# Allegro board BeagleDust Rev A0_20180906.brd
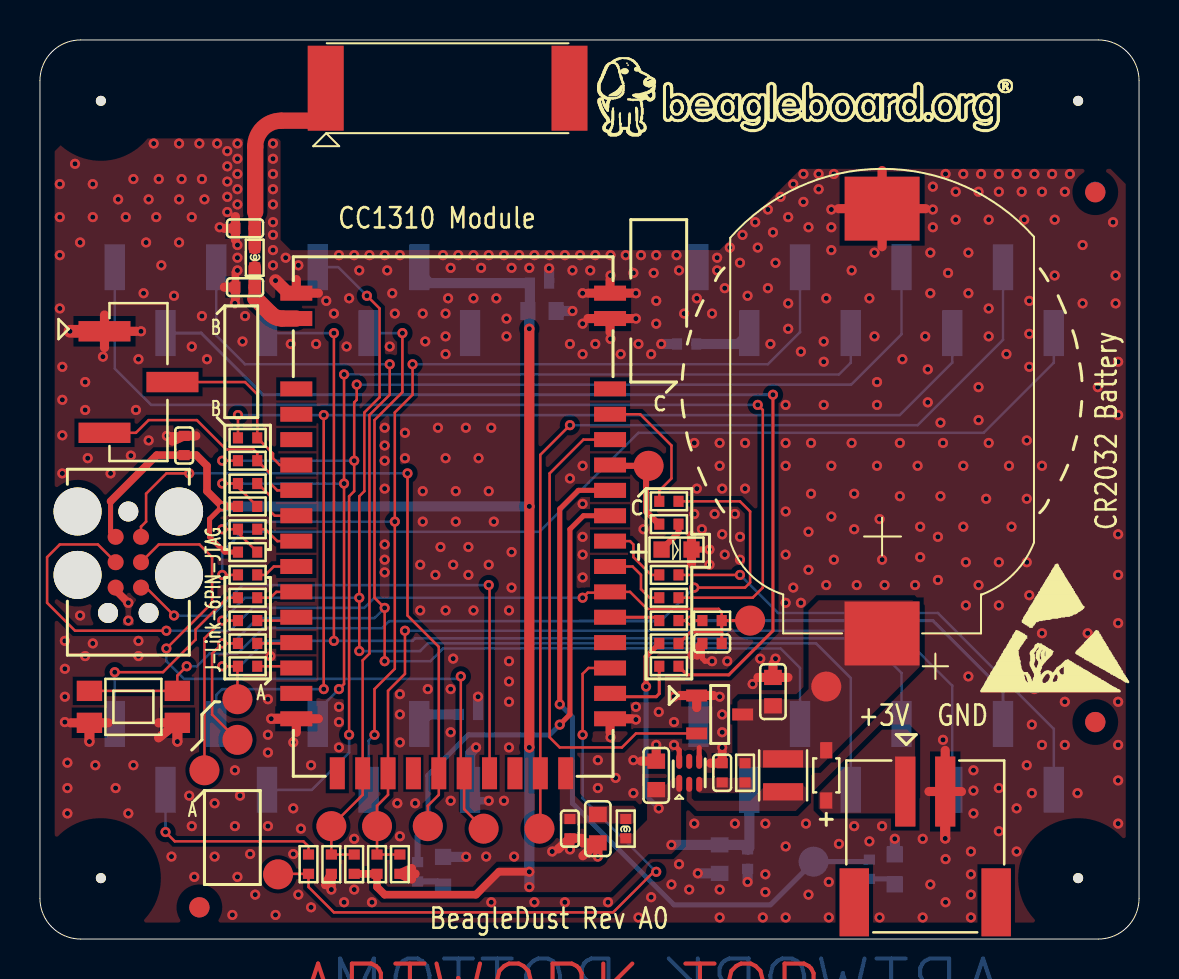
[diagram p0: board, top side]
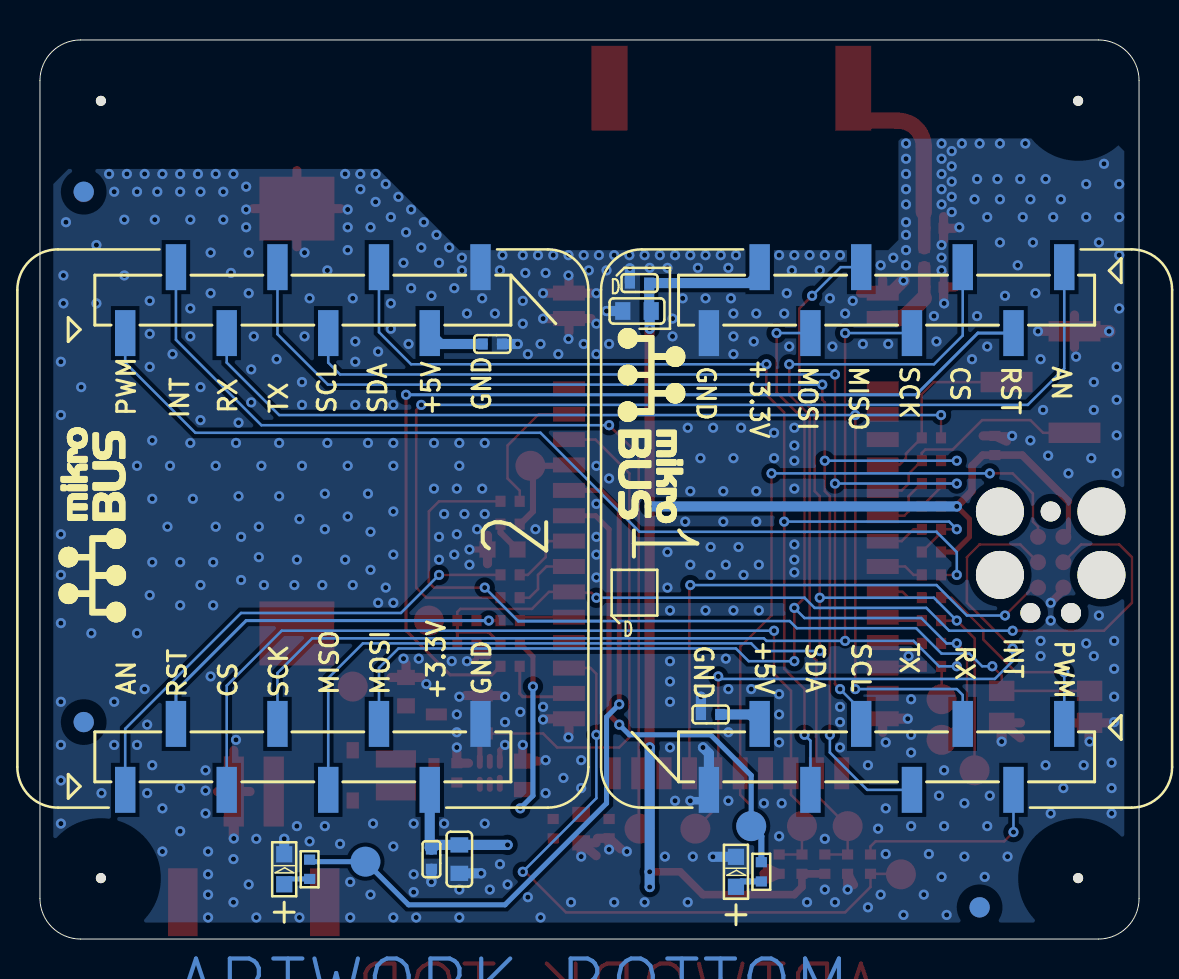
[diagram p1: board, bottom side, seen from below]

Outline 55 x 45 mm; copper layers: TOP, BOTTOM. Coordinates in mm from the lower left corner of the outline.
Outline path: 0,42.97 arc(0.6,44.4) 2.03,45 52.97,45 arc(54.4,44.4) 55,42.97 55,2.03 arc(54.4,0.6) 52.97,0 2.03,0 arc(0.6,0.6) 0,2.03 0,42.97

## Placement (name value [footprint] x y rotation side)
ANT1  ChipAntenna-1204  [ANT1204-SMT2P]  20.4 42.58 0 top
C1  0.1uF  [C0402]  7.22 24.7 90 top
C2  0.1uF  [C0402]  26.52 5.52 270 top
C3  22uF  [C0603]  27.92 5.52 270 top
C4  0.1uF  [C0402]  32.36 29.78 180 bottom
C5  0.1uF  [C0402]  35.41 4 270 bottom
C6  22uF  [C0603]  34.01 4 270 bottom
C7  10uF  [C0603]  36.68 12.38 90 top
C8  10uF  [C0603]  30.84 8.19 90 top
C9  0.1uF  [C0402]  34.14 8.32 90 top
C47  3.9pF  [C0402]  10.26 32.63 180 top
C48  0.1uF  [C0402]  25 32.83 0 bottom
C49  0.1uF  [C0402]  21.44 11.24 0 bottom
C50  22uF  [C0603]  25.12 31.43 0 bottom
C51  3.9pF  [C0402]  10.26 35.57 180 top
C52  0.1uF  [C0402]  33.63 14.79 180 top
D1  SD103AWS-7-F  [SOD323]  39.35 8.19 90 top
FB1  120ohm  [L0402]  29.31 5.52 90 top
J1  JTP254-S180A-103-002-GR  [HS3_508]  4.93 27.88 270 top
J2  TC2030-IDC-FP  [JTAG_TC2030-IDC-FP]  4.42 18.86 270 top
J3  2.54mm 1X8  [SOCKET8P508_2082X460X900N]  41.84 9.12 180 bottom
J4  2.54mm 1X8  [SOCKET8P508_2082X460X900N]  41.84 31.98 180 bottom
J5  2.00mm 1x2  [CONS2_2B79X86K]  44.3 4.63 180 top
J6  BLP2032SM-GTR  [BATTERY-HOLDER_CR2032]  42.14 27.49 90 top
J7  2.54mm 1X8  [SOCKET8P508_2082X460X900N]  12.63 31.98 0 bottom
J8  2.54mm 1X8  [SOCKET8P508_2082X460X900N]  12.63 9.12 0 bottom
L1  4.7uH  [L25X20]  37.19 8.19 270 top
L2  4.7nH  [L0402]  10.75 34.1 270 top
LED1  Green  [D0603]  31.85 19.49 0 top
LED2  Green  [D0603]  42.78 3.49 90 bottom
LED3  Green  [D0603]  20.17 3.36 90 bottom
MH1  NI  [MHNP275]  3.05 3.05 0 top
MH2  NI  [MHNP275]  51.95 41.95 0 top
MH3  NI  [MHNP275]  51.95 3.05 0 top
MH4  NI  [MHNP275]  3.05 41.95 0 top
NOREF  #VAL  [unnamed]  52.81 37.38 0 top
NOREF#2  -  [#2]  0 42.97 0 top
NOREF#3  -  [#2]  3.05 3.05 90 top
NOREF#4  -  [#2]  2.03 0 90 top
NOREF#5  #VAL  [unnamed]  7.98 1.59 0 top
NOREF#6  #VAL  [unnamed]  52.81 10.86 0 top
NOREF#7  -  [#2]  3.05 41.95 0 top
NOREF#8  #VAL  [unnamed]  52.81 10.86 180 bottom
NOREF#9  #VAL  [unnamed]  7.98 1.59 180 bottom
NOREF#10  #VAL  [unnamed]  52.81 37.4 180 bottom
R1  2.2K  [R0402]  10.39 19.37 0 top
R2  2.2K  [R0402]  10.39 21.65 0 top
R3  100R  [R0402]  10.39 25.08 0 top
R4  10K  [R0402]  31.47 17.08 0 top
R5  100R  [R0402]  10.39 23.94 0 top
R6  100R  [R0402]  10.39 22.8 0 top
R7  100R  [R0402]  10.39 20.51 0 top
R9  100R  [R0402]  10.39 15.94 0 top
R10  100R  [R0402]  10.39 14.79 0 top
R11  100R  [R0402]  10.39 13.65 0 top
R13  1M  [R0402]  15.72 3.75 90 top
R14  1M  [R0402]  16.87 3.75 90 top
R15  0R  [R0402]  14.58 3.75 90 top
R16  0R  [R0402]  18.01 3.75 90 top
R17  470R  [R0402]  31.47 20.76 0 top
R18  400R  [R0402]  35.28 8.32 270 top
R19  470R  [R0402]  41.51 3.49 270 bottom
R20  470R  [R0402]  18.9 3.36 270 bottom
R27  100R  [R0402]  31.47 18.22 0 top
R31  100R  [R0402]  31.47 13.65 0 top
R138  100R  [R0402]  33.63 15.94 180 top
R139  100R  [R0402]  31.47 15.94 0 top
R140  100R  [R0402]  13.44 3.75 90 top
R141  100R  [R0402]  10.39 17.08 0 top
R142  100R  [R0402]  10.39 18.22 0 top
R143  100R  [R0402]  31.47 21.91 0 top
R144  100K  [R0402]  31.47 14.79 0 top
S1  Tacticle Switch  [SWS4B46X28]  4.68 11.62 0 top
TP1  NI  [TP150]  35.54 15.94 90 top
TP3  NI  [TP150]  30.46 23.68 0 top
TP5  NI  [TP150]  38.71 3.87 180 bottom
TP6  NI  [TP150]  19.41 5.65 0 top
TP7  NI  [TP150]  22.2 5.52 0 top
TP8  NI  [TP150]  16.87 5.65 0 top
TP9  NI  [TP150]  19.41 5.65 180 bottom
TP10  NI  [TP150]  25 5.52 0 top
TP11  NI  [TP150]  39.35 12.64 0 top
TP12  NI  [TP150]  14.58 5.65 0 top
TP13  NI  [TP150]  9.88 12 0 top
TP14  NI  [TP150]  9.88 9.97 0 top
TP15  NI  [TP150]  8.23 8.44 0 top
TP16  NI  [TP150]  11.91 3.24 0 top
U1  E70 915T14S  [WIFIMD_EBYTE_E70_915T14]  20.68 21.14 180 top
U2  TPS3839L30DBZ  [SOT95P237X112-3N]  34.01 11.24 0 top
U3  TPS610981DSE  [SON50P150X150X80-6N]  32.49 8.32 90 top

## Library data of the parts
ANT1 = ChipAntenna-1204
C1-C9 C47-C52 = C
D1 = Diode Schottky
FB1 = FB
J1 = JTP254-S180A-103-002-GR
J2 = TC2030-IDC-FP
J3 J4 J7 J8 = SIP8
J5 = SIP2M2
J6 = BLP2032SM-GTR
L1 L2 = L
LED1-LED3 = LED
MH1-MH4 = METALLIC HOLE
NOREF NOREF#5 NOREF#6 NOREF#9 = -: Tolerance: #TOL; User Part Number: HAMP
NOREF#8 NOREF#10 = -: User Part Number: HAMP; Tolerance: #TOL
R1-R7 R9-R11 R13-R20 R27 R31 R138-R144 = R
S1 = PSW4
TP1 TP3 TP5-TP16 = TEST POINT
U1 = E70 915T14S
U2 = TPS3839L30DBZ
U3 = TPS610981DSE

## Footprints (pads in the part's own frame, mm; a bottom-side part is the same pattern mirrored in y, then rotated)
ANT1204-SMT2P
  rect 1.8x4.25 smd: 1(-6.1,0) 2(6.1,0)
BATTERY-HOLDER_CR2032
  rect 3.2x3.75 smd: 1(-12.2,0) 2(9.06,0)
C0402
  rect 0.508x0.559 smd: 1(-0.483,0) 2(0.483,0)
C0603
  rect 0.762x0.889 smd: 1(-0.711,0) 2(0.711,0)
CONS2_2B79X86K
  rect 1.016x3.505 smd: 1(1,-2.748) 2(-1,-2.748)
  rect 1.473x3.404 smd: 3(3.55,2.798) 4(-3.55,2.798)
D0603
  rect 0.813x0.813 smd: 1(-0.75,0) 2(0.75,0)
HS3_508
  rect 1.02x2.6 smd: 1(-2.54,-1.7) 2(0,1.7) 3(2.54,-1.7)
JTAG_TC2030-IDC-FP
  round 2.4 hole 2.4 unplated: (-2.54,2.54) (-2.54,-2.54) (0.635,2.54) (0.635,-2.54)
  round 1 hole 1 unplated: (-2.54,0) (2.54,1.016) (2.54,-1.016)
  round 0.8 smd: 1(-1.27,-0.635) 2(-1.27,0.635) 3(0,-0.635) 4(0,0.635) 5(1.27,-0.635) 6(1.27,0.635)
L25X20
  rect 0.864x2.007 smd: 1(-0.825,0) 2(0.825,0)
L0402
  rect 0.508x0.559 smd: 1(-0.483,0) 2(0.483,0)
MHNP275
  round 0.5 hole 2.75 unplated: (0,0)
R0402
  rect 0.508x0.559 smd: 1(-0.483,0) 2(0.483,0)
SOCKET8P508_2082X460X900N
  rect 1.02x2.3 smd: 1(-8.89,-1.65) 2(-6.35,1.65) 3(-3.81,-1.65) 4(-1.27,1.65) 5(1.27,-1.65) 6(3.81,1.65) 7(6.35,-1.65) 8(8.89,1.65)
SOD323
  rect 0.813x0.61 smd: 1(-1.256,0) 2(1.256,0)
SON50P150X150X80-6N
  oval 0.85x0.3 smd: 1(-0.525,0.5)
  oval 0.75x0.3 smd: 2(-0.575,0) 3(-0.575,-0.5) 4(0.575,-0.5) 5(0.575,0) 6(0.575,0.5)
SOT95P237X112-3N
  rect 1.05x0.6 smd: 1(-1.15,0.95) 2(-1.15,-0.95) 3(1.15,0)
SWS4B46X28
  rect 1.27x1.016 smd: 1(-2.2,-0.8) 2(-2.2,0.8) 3(2.2,-0.8) 4(2.2,0.8)
TP150
  round 1.5 smd: 1(0,0)
unnamed
  round 1.016 smd: 1(0,0)
WIFIMD_EBYTE_E70_915T14
  rect 1.6x0.75 smd: 1(7.85,-11.18) 2(7.85,-9.91) 3(7.85,-6.39) 4(7.85,-5.12) 5(7.85,-3.85) 6(7.85,-2.58) 7(7.85,-1.31) 8(7.85,-0.04) 9(7.85,1.23) 10(7.85,2.5) 11(7.85,3.77) 12(7.85,5.04) 13(7.85,6.31) 14(7.85,7.58) 15(7.85,8.85) 16(7.85,10.12) 27(-7.85,10.12) 28(-7.85,8.85) 29(-7.85,7.58) 30(-7.85,6.31) 31(-7.85,5.04) 32(-7.85,3.77) 33(-7.85,2.5) 34(-7.85,1.23) 35(-7.85,-0.04) 36(-7.85,-1.31) 37(-7.85,-2.58) 38(-7.85,-3.85) 39(-7.85,-5.12) 40(-7.85,-6.39) 41(-7.85,-9.91) 42(-7.85,-11.18)
  rect 0.75x1.6 smd: 17(5.8,12.85) 18(4.53,12.85) 19(3.26,12.85) 20(1.99,12.85) 21(0.72,12.85) 22(-0.55,12.85) 23(-1.82,12.85) 24(-3.09,12.85) 25(-4.36,12.85) 26(-5.63,12.85)

## Nets
GND: C1.2 C2.2 C3.2 C4.2 C5.2 C6.2 C7.2 C8.2 C9.2 C47.2 C48.2 C49.2 C50.2 C51.2 C52.2 J1.1 J2.5(GND) J3.8 J4.8 J5.2 J6.2(GND) J7.8 J8.8 LED1.2(C) LED2.2(C) LED3.2(C) R15.1 R16.1 S1.1 S1.3 U1.1(GND1) U1.16(GND2) U1.27(GND3) U1.41(GND4) U1.42(GND5) U2.1(GND) U3.4(MODE) U3.6(GND)
CC1310_RESETN: C52.1 J2.3(#RESET) R138.1 R144.2 TP1.1(TP) U1.32(RST)
CC1310_TCK: J2.4(SWCLK) TP7.1(TP) U1.22(TCKC)
CC1310_TDO: J2.6(SWO) U1.23(DIO_16)
CC1310_TMS: J2.2(SWDIO) TP6.1(TP) U1.21(TMSC)
DIO2_RXD: J4.3 J8.3 R3.1
DIO3_TXD: J4.4 J8.4 R5.1
DIO4_SCL: J4.5 J8.5 R2.2 R6.1
DIO5_SDA: J4.6 J8.6 R1.2 R7.1
DIO6_PWM2: J4.1 R142.1
DIO7_PWM1: J8.1 R141.1
DIO8_MISO: J3.5 J7.5 R9.1 TP15.1(TP)
DIO9_MOSI: J3.6 J7.6 R10.1 TP14.1(TP)
DIO10_SCLK: J3.4 J7.4 R11.1 TP13.1(TP)
DIO13_CS1: J7.3 R13.2 R15.2 TP12.1(TP) U1.18(DIO_13/M0)
DIO14_CS2: J3.3 R14.2 R16.2 TP8.1(TP) U1.19(DIO_14/RXD)
DIO18_INT2: J4.2 TP10.1(TP) U1.25(DIO_18/AUX)
DIO19_RST1: J7.2 R31.2
DIO20_INT1: J8.2 R140.2
DIO22_RST2: J3.2 R138.2 R139.2
DIO23_AN1: J7.1 R4.2
DIO24_AN2: J3.1 R27.2
LOWBAT_DETECT: U1.38(DIO_28) U2.2(R\E\S\E\T\)
MIKROBUS_STATUS1: R20.1 TP9.1(TP) U1.35(DIO_25)
MIKROBUS_STATUS2: R19.1 TP5.1(TP) U1.36(DIO_26)
POWERINDICATOR: R17.1 TP3.1(TP) U1.37(DIO_27)
SYS_3V3: C1.1 C5.1 C6.1 C8.1 C48.1 C50.1 FB1.1 J2.1(VTREF) J3.7 J7.7 R1.1 R2.1 R13.1 R14.1 R144.1 U3.1(VMAIN)
USRE BUTTON: R143.1 U1.39(DIO_29)
N19096019: LED1.1(A) R17.2
N19097798: C4.1 J4.7
N19109066: L1.2 U3.2(SW)
N19109499: C7.1 D1.2(C) J6.1(VCC) L1.1 R18.1 TP11.1(TP) U2.3(VDD)
N19110009: C9.1 R18.2 U3.3(VIN)
N19122018: D1.1(A) J5.1
N19127612: J1.2 R3.2 U1.6(DIO_2/LNA_EN)
N19127618: J1.3 R5.2 U1.7(DIO_3/PA_EN)
N19127779: C2.1 C3.1 FB1.2 U1.26(VCC-2.2~3.8V)
N19127922: R6.2 U1.8(DIO_4)
N19127924: R7.2 U1.9(DIO_5)
N19127989: R9.2 U1.12(DIO_8)
N19127991: R10.2 U1.13(DIO_9)
N19127993: R11.2 U1.14(DIO_10)
N19128918: R143.2 S1.2 S1.4
N19129914: R4.1 U1.33(DIO_23)
N19137656: C47.1 L2.2 U1.2(ANT)
N19139252: ANT1.1 C51.1 L2.1
N19142206: C49.1 J8.7
N19142409: LED3.1(A) R20.2
N19145355: R27.1 U1.34(DIO_24)
N19145484: R31.1 U1.28(DIO_19)
N19147736: LED2.1(A) R19.2
N19157450: R140.1 TP16.1(TP) U1.29(DIO_20)
N19158301: R141.2 U1.11(DIO_7)
N19158356: R142.2 U1.10(DIO_6)
N19158507: R139.1 U1.31(DIO_22)

Pads without a net: ANT1 2; J5 3 4; NOREF 1; NOREF#5 1; NOREF#6 1; NOREF#8 1; NOREF#9 1; NOREF#10 1; U1 3 4 5 15 17 20 24 30 40; U3 5

## Via types
v1: diameter 0.508, hole 0.254, TOP to BOTTOM, 569 vias

## Routing (per net, layer and track width the routed paths; a pad name or vN(x,y) marks a point on that pad's centre or on a via; arc(x,y) is an arc through that point)
GND: length 77.5
  TOP w0.254: v1(31.73,9.71) 31.99,9.45 U3.6 ; C52.2 33.15,14.03 33.28,13.91 v1(33.63,13.91) ; U3.4 32.99,9.58
  TOP w0.305: LED1.2 v1(33.5,19.49)
  TOP w0.381: v1(9.88,33.46) 9.78,33.36 C47.2 ; C1.2 v1(6.35,25.18) ; 3.79,17.59 3.79,17.46 v1(4.42,16.83)
  TOP w0.457: 7.8,25.18 C1.2 6.63,24.92 ; v1(26.52,4.48) C2.2 ; C2.2 27.1,5.04 ; C2.2 25.93,4.51 ; 5.93,10.82 S1.3 5.93,10.07 ; 32.6,18.78 LED1.2 32.6,20.21 ; R16.1 18.59,3 ; R16.1 18.59,3.53 ; R16.1 18.77,3.26 ; 32.62,14.21 C52.2 32.88,14.21 ; J6.2 44.32,36.55 ; J6.2 39.96,36.55 ; J6.2 42.14,38.46 ; J6.2 42.14,34.65 ; 9.22,32.63 C47.2 9.78,32.04 ; 27.17,4.17 C3.2 ; C3.2 v1(27.92,4.13) ; C3.2 27.17,4.81 ; U1.42 29.63,32.33 ; U1.42 28.53,33.01 ; U1.42 27.42,32.33 ; U1.41 29.63,31.06 ; U1.41 28.53,30.37 ; U1.41 27.42,31.06 ; J5.2 45.3,9.44 ; J5.2 46.11,7.38 ; J5.2 44.49,7.38 ; 28.53,10.34 U1.27 29.63,11.02 ; 9.22,35.57 C51.2 ; C51.2 9.78,36.16 ; C51.2 9.78,34.99 ; C7.2 37.43,13.09 ; C7.2 35.93,13.09 ; C7.2 36.68,13.78 ; 30.84,9.59 C8.2 30.09,8.9 ; 13.93,32.33 U1.1 12.83,33.01 ; J1.1 3.23,31.23 ; J1.1 3.23,29.6 ; J1.1 4.83,30.42 ; 14.29,2.72 R15.1 14.58,2.7 ; 12.83,10.34 U1.16 13.93,11.02 ; U2.1 33.69,12.19 ; U2.1 32.03,12.19 ; U2.1 32.86,11.58 ; 3.42,10.82 S1.1 1.53,10.82 ; 34.14,9.36 C9.2 33.55,8.8
  TOP w0.508: S1.3 v1(6.88,9.88) ; U1.16 v1(11.57,11.02) ; S1.1 v1(2.48,9.88) ; J5.2 v1(45.3,5.03)
  TOP w0.635: J1.1 v1(1.5,30.42) ; v1(11.79,32.96) 12.42,32.33 U1.1
  BOTTOM w0.381: J8.8 21.52,7.09 21.69,6.92 v1(22.46,6.92)
  BOTTOM w0.508: C49.2 v1(21.92,12.13) ; LED2.2 v1(42.78,5.02) ; C6.2 v1(32.92,3.29) ; v1(21.82,9.59) 21.52,9.29 J8.8 ; LED3.2 v1(21.32,4.12) ; C50.2 v1(26.65,31.43) ; C5.2 v1(35.41,2.86) ; C4.2 v1(31.09,29.78) ; C48.2 v1(25.48,33.57)
  vias: v1(0.99,37.78) v1(0.99,36.13) v1(0.99,34.23) v1(0.99,31.56) v1(1.12,28.64) v1(1.12,26.99) v1(1.12,25.21) v1(1.12,23.3) v1(1.25,14.92) v1(1.25,13.52) v1(1.25,12.13) v1(1.25,10.86) v1(1.37,8.83) v1(1.37,7.56) v1(1.37,6.29) v1(1.75,38.8) v1(2.01,34.86) v1(2.01,16.19) v1(2.26,27.88) v1(2.26,26.48) v1(2.26,14.16) v1(2.39,24.07) v1(2.64,37.78) v1(2.64,36.13) v1(2.64,14.79) v1(2.77,8.7) v1(3.15,29.15) v1(3.53,23.3) v1(3.79,7.56) v1(3.91,37.02) v1(4.29,36.13) v1(4.42,15.94) v1(4.42,6.29) v1(4.55,24.19) v1(4.68,38.04) v1(4.68,8.7) v1(4.8,26.48) v1(4.93,29.02) v1(4.93,14.92) v1(4.93,14.16) v1(5.06,30.42) v1(5.18,32.32) v1(5.31,34.86) v1(5.44,37.02) v1(5.44,24.95) v1(5.69,39.81) v1(5.82,36.13) v1(5.95,38.04) v1(6.07,33.72) v1(6.58,4.13) v1(6.71,32.19) v1(6.96,39.81) v1(6.96,37.02) v1(6.96,34.86) v1(7.09,38.04) v1(7.47,7.17) v1(7.6,36.13) v1(7.6,29.65) v1(7.6,5.65) v1(7.72,3.11) v1(7.98,39.81) v1(8.1,38.04) v1(8.1,31.18) v1(8.23,37.02) v1(8.36,29.02) v1(8.74,6.79) v1(8.74,4.13) v1(8.87,39.81) v1(8.99,35.62) v1(9.37,39.43) v1(9.37,38.67) v1(9.37,37.91) v1(9.37,37.15) v1(9.37,36.38) v1(9.63,1.21) v1(9.76,31.81) v1(9.76,8.44) v1(9.76,5.65) v1(9.88,39.81) v1(9.88,39.05) v1(9.88,38.29) v1(9.88,37.53) v1(9.88,36.77) v1(9.88,34.73) v1(9.88,34.1) v1(9.88,3.11) v1(10.01,7.17) v1(10.14,29.91) v1(10.26,31.18) v1(10.52,4.25) v1(10.77,2.22) v1(11.41,12) v1(11.41,10.22) v1(11.41,9.33) v1(11.41,5.65) v1(11.53,14.16) v1(11.66,39.81) v1(11.66,39.05) v1(11.66,38.29) v1(11.66,37.53) v1(11.66,36.77) v1(11.66,35.88) v1(11.66,35.24) v1(11.66,34.48) v1(11.66,33.72) v1(11.79,1.21) v1(12.3,34.1) v1(12.55,29.78) v1(12.68,9.84) v1(12.68,6.54) v1(12.68,4.25) v1(12.93,33.72) v1(12.93,2.22) v1(13.06,5.52) v1(13.57,8.7) v1(13.57,1.59) v1(13.82,29.78) v1(14.33,31.94) v1(14.58,2.48) v1(14.71,31.3) v1(14.96,34.23) v1(14.96,11.62) v1(14.96,10.86) v1(14.96,9.59) v1(15.22,1.84) v1(15.34,29.65) v1(15.47,32.07) v1(15.72,34.23) v1(15.72,5.02) v1(15.72,2.48) v1(15.98,33.46) v1(16.49,34.23) v1(16.61,1.84) v1(17.25,34.23) v1(17.25,25.59) v1(17.25,24.7) v1(17.25,23.94) v1(17.25,22.54) v1(17.25,19.75) v1(17.25,18.99) v1(17.25,18.35) v1(17.38,33.46) v1(17.5,29.65) v1(17.63,32.32) v1(17.76,31.3) v1(17.88,6.79) v1(18.01,34.23) v1(18.01,12.25) v1(18.01,11.24) v1(18.01,9.84) v1(18.01,5.14) v1(18.26,25.34) v1(18.26,24.07) v1(18.77,6.79) v1(19.03,18.73) v1(19.03,16.45) v1(19.15,31.3) v1(19.15,22.41) v1(19.15,20.89) v1(19.28,29.91) v1(19.41,12.51) v1(19.79,18.22) v1(19.92,25.59) v1(20.04,19.62) v1(20.17,34.23) v1(20.3,31.3) v1(20.3,30.16) v1(20.3,29.27) v1(20.3,24.07) v1(20.3,16.45) v1(20.42,32.07) v1(20.55,33.59) v1(20.55,12.51) v1(20.55,10.35) v1(20.55,6.92) v1(20.68,18.73) v1(20.68,14.03) v1(20.8,22.41) v1(20.8,20.89) v1(20.93,34.23) v1(21.31,25.59) v1(21.44,19.62) v1(21.44,18.22) v1(21.69,34.23) v1(21.69,32.07) v1(21.69,16.45) v1(21.95,24.07) v1(22.07,33.59) v1(22.33,4.13) v1(22.46,34.23) v1(22.46,22.41) v1(22.46,18.73) v1(22.58,25.59) v1(22.58,1.84) v1(22.71,20.89) v1(22.84,32.07) v1(23.22,34.23) v1(23.22,6.92) v1(23.34,31.05) v1(23.34,30.16) v1(23.47,16.45) v1(23.47,13.91) v1(23.47,12.89) v1(23.47,11.87) v1(23.47,9.59) v1(23.6,33.59) v1(23.6,19.37) v1(23.6,17.59) v1(23.73,4.13) v1(23.98,34.23) v1(24.49,33.59) v1(24.74,34.23) v1(24.74,1.84) v1(25.5,34.23) v1(25.63,4.38) v1(26.27,34.23) v1(26.27,1.84) v1(26.52,29.78) v1(26.52,23.05) v1(26.65,33.46) v1(27.03,34.23) v1(27.15,32.32) v1(27.15,30.8) v1(27.15,29.27) v1(27.15,23.68) v1(27.15,21.78) v1(27.15,20.13) v1(27.15,19.24) v1(27.15,18.1) v1(27.54,33.46) v1(27.79,34.23) v1(27.79,29.78) v1(27.92,8.95) v1(27.92,7.56) v1(28.42,1.84) v1(28.55,34.23) v1(28.55,33.21) v1(28.55,30.03) v1(28.55,10.1) v1(28.81,8.06) v1(29.06,29.27) v1(29.31,34.23) v1(29.69,33.34) v1(29.69,8.95) v1(29.69,7.3) v1(29.82,32.32) v1(29.82,31.05) v1(29.82,11.62) v1(29.82,10.98) v1(29.95,29.78) v1(29.95,1.08) v1(30.08,34.23) v1(30.2,20.51) v1(30.58,29.27) v1(30.58,2.09) v1(30.71,33.34) v1(30.84,34.23) v1(30.84,31.94) v1(30.84,30.8) v1(30.84,9.71) v1(30.96,11.37) v1(31.6,2.73) v1(31.73,12.13) v1(31.73,10.86) v1(31.85,34.23) v1(31.98,33.46) v1(31.98,3.75) v1(32.23,31.3) v1(32.49,2.48) v1(32.74,24.83) v1(32.74,21.27) v1(32.74,5.78) v1(32.87,32.07) v1(32.87,22.54) v1(33.12,20.51) v1(33.5,18.73) v1(33.63,31.3) v1(33.76,21.27) v1(33.89,34.1) v1(33.89,33.46) v1(34.01,24.83) v1(34.01,23.68) v1(34.01,12.13) v1(34.01,2.48) v1(34.01,1.08) v1(34.14,22.54) v1(34.14,20.26) v1(34.14,11.24) v1(34.14,10.35) v1(34.14,9.59) v1(34.27,32.57) v1(34.27,19.24) v1(34.39,13.91) v1(34.52,34.61) v1(34.77,21.27) v1(34.77,5.78) v1(35.03,33.84) v1(35.03,20.13) v1(35.03,18.99) v1(35.16,35.24) v1(35.28,24.83) v1(35.28,22.54) v1(35.41,32.19) v1(35.66,12.76) v1(35.79,35.88) v1(35.92,34.61) v1(36.04,14.03) v1(36.17,1.08) v1(36.3,5.78) v1(36.3,3.24) v1(36.3,2.35) v1(36.43,36.51) v1(36.43,32.57) v1(36.55,29.78) v1(36.68,35.37) v1(36.81,33.84) v1(36.81,14.03) v1(37.06,37.15) v1(37.31,26.73) v1(37.31,24.83) v1(37.31,23.68) v1(37.31,21.4) v1(37.31,19.24) v1(37.31,16.83) v1(37.31,4.63) v1(37.31,1.08) v1(37.44,36.13) v1(37.44,31.81) v1(37.44,30.54) v1(37.7,37.78) v1(37.7,17.59) v1(38.08,29.4) v1(38.08,16.83) v1(38.2,38.29) v1(38.2,36.89) v1(38.33,5.78) v1(38.46,35.62) v1(38.46,20.38) v1(38.46,18.48) v1(38.46,2.22) v1(38.58,24.83) v1(38.58,22.29) v1(38.97,38.29) v1(38.97,37.53) v1(39.22,29.91) v1(39.22,28.89) v1(39.22,26.73) v1(39.35,32.07) v1(39.35,17.72) v1(39.47,2.86) v1(39.47,1.08) v1(39.6,36.51) v1(39.6,35.62) v1(39.6,34.48) v1(39.6,23.68) v1(39.6,21.14) v1(39.73,38.29) v1(39.73,18.99) v1(39.98,4.76) v1(40.62,33.46) v1(40.62,24.83) v1(40.74,22.29) v1(40.74,20.51) v1(40.74,5.65) v1(40.87,17.72) v1(41.51,32.07) v1(41.51,4.89) v1(41.76,34.35) v1(41.76,30.16) v1(41.89,27.88) v1(41.89,26.73) v1(41.89,23.68) v1(42.01,21.02) v1(42.01,1.08) v1(42.14,18.99) v1(42.14,5.65) v1(42.27,17.72) v1(43.03,24.83) v1(43.03,22.16) v1(43.16,29.02) v1(43.79,17.72) v1(43.92,23.68) v1(44.05,20.64) v1(44.05,19.11) v1(44.17,5.02) v1(44.17,1.08) v1(44.3,30.16) v1(44.43,28.51) v1(44.43,26.86) v1(44.55,34.35) v1(44.55,32.32) v1(44.55,2.73) v1(44.68,37.65) v1(44.68,36.51) v1(44.68,35.62) v1(44.93,20.13) v1(44.93,17.97) v1(45.06,25.84) v1(45.06,22.16) v1(45.19,24.83) v1(45.19,9.97) v1(45.32,38.29) v1(45.32,4) v1(45.32,1.84) v1(45.44,33.34) v1(45.82,37.4) v1(45.82,36) v1(46.2,38.29) v1(46.2,23.68) v1(46.2,20.64) v1(46.33,18.86) v1(46.33,16.7) v1(46.46,34.35) v1(46.46,32.32) v1(46.46,13.14) v1(46.59,4.38) v1(46.59,3.24) v1(46.59,2.22) v1(46.59,1.08) v1(46.71,8.44) v1(46.71,7.43) v1(46.71,6.29) v1(46.97,37.4) v1(46.97,27.62) v1(46.97,25.97) v1(46.97,17.72) v1(47.09,38.29) v1(47.35,22.03) v1(47.47,36) v1(47.47,31.56) v1(47.47,30.16) v1(47.47,24.83) v1(47.98,38.29) v1(47.98,37.4) v1(47.98,18.86) v1(47.98,16.7) v1(47.98,7.56) v1(47.98,5.4) v1(48.36,29.27) v1(48.49,23.68) v1(48.62,20.64) v1(48.87,38.29) v1(48.87,6.54) v1(48.87,4.38) v1(49.13,37.4) v1(49.25,36) v1(49.38,24.95) v1(49.38,22.03) v1(49.38,18.86) v1(49.38,8.7) v1(49.51,31.94) v1(49.51,30.29) v1(49.51,28.64) v1(49.51,17.21) v1(49.63,10.73) v1(49.63,7.3) v1(49.76,38.29) v1(49.76,12.51) v1(50.14,37.4) v1(50.14,23.68) v1(50.14,15.3) v1(50.14,9.71) v1(50.65,38.29) v1(50.78,36) v1(50.78,33.21) v1(51.28,37.4) v1(51.28,11.87) v1(51.28,9.71) v1(51.54,38.29) v1(51.92,7.3) v1(52.17,34.73) v1(52.17,31.81) v1(52.43,15.3) v1(52.94,27.62) v1(53.7,35.88) v1(53.82,33.21) v1(53.82,31.81) v1(53.95,28.89) v1(53.95,26.22) v1(53.95,20.26) v1(53.95,18.22) v1(53.95,15.81) v1(53.95,11.87) v1(53.95,9.71) v1(53.95,7.94) v1(53.95,5.78)
CC1310_RESETN: length 47.3
  TOP w0.127: v1(27.15,17.08) 27.41,17.33 28.49,17.33 U1.32 29.53,17.37 30.38,16.52 33.96,16.52 34.11,16.37 R138.1 ; v1(6.33,15.43) 1.75,15.43 0.36,16.83 0.36,19.11 0.99,19.75 2.9,19.75 3.79,18.86
  TOP w0.152: 34.11,15.35 32.54,15.35 31.98,14.79 R144.2 ; 34.11,15.35 R138.1 TP1.1 ; 34.11,15.35 C52.1
  BOTTOM w0.127: v1(27.15,17.08) 16.74,17.08 16.23,16.57 10.64,16.57 9.5,15.43 v1(6.33,15.43)
CC1310_TCK: length 33.6
  TOP w0.127: v1(6.33,14.54) 8.61,16.83 8.61,19.11 7.98,19.75 5.95,19.75 J2.4 ; TP7.1 21.23,6.5 U1.22 21.06,8.46 v1(21.06,13.14)
  BOTTOM w0.127: v1(21.06,13.14) 20.93,13.02 7.22,13.02 6.33,13.91 v1(6.33,14.54)
CC1310_TDO: length 28
  TOP w0.127: 5.06,17.59 5.31,17.59 v1(6.71,16.19) ; v1(22.46,17.72) 22.5,17.67 U1.23
  BOTTOM w0.127: v1(6.71,16.19) 8.61,16.19 10.14,17.72 v1(22.46,17.72)
CC1310_TMS: length 34.3
  TOP w0.127: TP6.1 19.41,6.67 19.96,7.22 U1.21 19.96,14.63 18.39,16.19 v1(18.39,23.3) ; v1(7.47,23.3) 6.33,23.3 5.31,22.29 5.31,20.89 5.06,20.64 J2.2
  BOTTOM w0.127: v1(7.47,23.3) v1(18.39,23.3)
DIO2_RXD: length 60.1
  TOP w0.127: R3.1 v1(9.91,26.22) ; v1(14.2,12.51) v1(14.2,26.22)
  BOTTOM w0.127: v1(14.2,12.51) 9.12,12.51 8.82,12.21 J8.3 ; J4.3 45.65,28.85 43.03,26.22 v1(14.2,26.22) v1(9.91,26.22)
DIO3_TXD: length 62.5
  TOP w0.127: R5.1 v1(9.12,23.94) ; v1(15.85,27.75) 15.85,26.99 15.72,26.86 v1(15.72,23.94) 15.72,22.41 15.47,22.16 v1(15.47,10.22)
  BOTTOM w0.127: v1(15.47,10.22) 15.47,9.33 13.6,7.47 J8.4 ; v1(15.85,27.75) 40.59,27.75 43.11,30.27 J4.4 ; v1(15.72,23.94) v1(9.12,23.94)
DIO4_SCL: length 53.5
  TOP w0.127: v1(15.22,28.26) v1(15.22,22.8) 15.22,12.76 v1(14.96,12.51) ; R2.2 9.91,22.62 R6.1 v1(9.12,22.8)
  BOTTOM w0.127: J8.5 13.9,11.45 v1(14.96,12.51) ; v1(9.12,22.8) v1(15.22,22.8) ; v1(15.22,28.26) 39.98,28.26 40.57,28.85 J4.5
DIO5_SDA: length 56.6
  TOP w0.127: v1(9.12,20.51) R7.1 9.91,20.33 R1.2 ; v1(16.74,10.22) 16.74,12.51 17.76,13.52 v1(17.76,20.89) 17.76,26.35 18.65,27.24 v1(18.65,28.76)
  BOTTOM w0.127: v1(9.12,20.51) 9.5,20.89 v1(17.76,20.89) ; v1(18.65,28.76) 36.43,28.76 38.03,30.37 J4.6 ; v1(16.74,10.22) 16.44,9.93 J8.6
DIO6_PWM2: length 48.9
  TOP w0.127: R142.1 v1(9.12,18.22)
  BOTTOM w0.127: J4.1 50.73,28.85 47.22,25.34 29.95,25.34 25,20.38 10.14,20.38 9.12,19.37 v1(9.12,18.22)
DIO7_PWM1: length 10.6
  TOP w0.127: R141.1 9.37,17.08 7.79,15.49 7.79,14.99 6.16,13.35 v1(3.74,13.35)
  BOTTOM w0.127: J8.1 v1(3.74,13.35)
DIO8_MISO: length 68.6
  TOP w0.127: R9.1 v1(9.12,15.94) 8.23,15.05 TP15.1 ; v1(15.98,14.41) v1(15.98,17.08) 15.98,22.16 16.23,22.41 16.23,26.35 16.99,27.11 16.99,31.56 v1(16.36,32.19)
  BOTTOM w0.127: v1(16.36,32.19) 14.93,33.63 J7.5 ; v1(15.98,14.41) 19.03,14.41 19.41,14.79 38.84,14.79 40.57,13.06 J3.5 ; v1(15.98,17.08) 10.26,17.08 v1(9.12,15.94)
DIO9_MOSI: length 58.4
  TOP w0.127: v1(17.25,13.91) v1(17.25,16.57) 16.74,17.08 16.74,25.97 18.14,27.37 v1(18.14,30.33) ; R10.1 v1(9.12,14.79) 8.61,14.29 8.61,11.24 TP14.1
  BOTTOM w0.127: v1(9.12,14.79) 9.63,14.79 10.9,16.06 16.74,16.06 v1(17.25,16.57) ; J3.6 38.03,13.57 37.06,14.54 20.17,14.54 19.53,13.91 v1(17.25,13.91) ; v1(18.14,30.33) J7.6
DIO10_SCLK: length 59
  TOP w0.127: v1(14.71,30.33) v1(14.71,14.92) ; v1(9.12,13.65) R11.1 9.88,13.63 TP13.1
  BOTTOM w0.127: v1(14.71,30.33) J7.4 ; J3.4 43.11,13.31 41.38,15.05 18.77,15.05 18.65,14.92 v1(14.71,14.92) 11.28,14.92 10.01,13.65 v1(9.12,13.65)
DIO13_CS1: length 39.6
  TOP w0.127: R13.2 R15.2 TP12.1 16.15,7.22 U1.18 16.15,13.95 16.49,14.29 16.49,26.22 17.5,27.24 v1(17.5,28.76)
  BOTTOM w0.127: v1(17.5,28.76) 10.26,28.76 8.82,30.21 J7.3
DIO14_CS2: length 46.7
  TOP w0.127: v1(18.26,15.43) 18.26,13.27 17.42,12.42 U1.19 17.42,7.22 16.87,6.67 TP8.1 R14.2 R16.2
  BOTTOM w0.127: v1(18.26,15.43) 42.9,15.43 45.65,12.68 J3.3
DIO18_INT2: length 47.9
  TOP w0.127: v1(26.52,25.72) 25.04,24.23 U1.25 25.04,5.57 TP10.1
  BOTTOM w0.127: v1(26.52,25.72) 43.92,25.72 48.19,29.99 J4.2
DIO19_RST1: length 49.3
  TOP w0.152: R31.2 32.39,13.22 34.47,13.22 36.68,15.43 v1(36.68,27.24)
  BOTTOM w0.152: v1(36.68,27.24) 11.15,27.24 8.07,30.33 J7.2
DIO20_INT1: length 10
  TOP w0.127: v1(6.28,5.35) 6.75,4.89 13.18,4.89 13.44,4.63 R140.2
  BOTTOM w0.127: J8.2 v1(6.28,5.35)
DIO22_RST2: length 20
  TOP w0.152: R139.2 v1(32.54,15.94) R138.2
  BOTTOM w0.152: J3.2 48.19,12.43 44.68,15.94 v1(32.54,15.94)
DIO23_AN1: length 51.7
  TOP w0.127: v1(35.92,26.73) 36.17,26.48 36.17,17.59 35.66,17.08 R4.2
  BOTTOM w0.127: v1(35.92,26.73) 5.56,26.73 3.74,28.55 J7.1
DIO24_AN2: length 25
  TOP w0.127: v1(35.03,18.22) R27.2
  BOTTOM w0.127: v1(35.03,18.22) 36.93,16.32 44.93,16.32 50.73,10.52 J3.1
LOWBAT_DETECT: length 24.8
  TOP w0.127: U1.38 27.19,24.99 25.5,23.3 25.5,10.1 26.01,9.59 29.12,9.59 29.82,10.29 U2.2
MIKROBUS_STATUS1: length 24.5
  TOP w0.254: U1.35 27.19,21.18 26.52,20.51 26.52,11.24 v1(26.01,10.73)
  BOTTOM w0.254: v1(26.01,10.73) 25.5,10.22 21.44,10.22 19.41,8.19 TP9.1
  BOTTOM w0.305: R20.1 18.9,5.14 TP9.1
MIKROBUS_STATUS2: length 35.8
  TOP w0.254: v1(26.01,11.75) 26.01,21.53 26.94,22.45 U1.36
  BOTTOM w0.254: R19.1 41.4,3.87 TP5.1 36.55,1.71 31.73,1.71 26.65,6.79 26.65,11.11 v1(26.01,11.75)
POWERINDICATOR: length 5.2
  TOP w0.305: R17.1 30.96,20.76 30.33,21.4 30.33,23.56 TP3.1 28.57,23.68 U1.37
SYS_3V3: length 92
  TOP w0.254: R144.1 30.33,14.13 v1(30.33,12.64) ; 3.53,21.91 3.53,20.38 3.79,20.13 ; v1(9.12,21.65) 8.49,21.02 8.49,20.13 9.25,19.37 R1.1
  TOP w0.381: R13.1 R14.1 16.87,2.6 17.25,2.22 21.82,2.22 22.96,3.36 v1(24.49,3.36) ; 3.53,21.91 5.84,24.22 C1.1 7.82,24.22 8.36,23.68 8.36,22.41 v1(9.12,21.65) R2.1
  TOP w0.508: v1(24.49,30.54) v1(24.49,21.65) v1(24.49,9.59)
  BOTTOM w0.254: v1(30.96,6.54) 30.33,7.17 v1(30.33,12.64)
  BOTTOM w0.508: v1(24.49,9.59) v1(24.49,3.36) v1(24.49,2.6) ; v1(31.6,4.71) C6.1 35.18,4.71 C5.1 35.49,4.57 J3.7 ; J7.7 18.98,33.34 19.49,32.83 C48.1 24.51,31.53 C50.1 24.49,31.36 v1(24.49,30.54) ; v1(24.49,21.65) v1(9.12,21.65)
USRE BUTTON: length 6.8
  TOP w0.127: U1.39 30.04,26.26 31.6,24.7 31.6,23.05 30.99,22.44 R143.1
N19096019: length 1.6
  TOP w0.305: LED1.1 31.95,20.35 R17.2
N19097798: length 2.9
  BOTTOM w0.508: C4.1 34.95,29.78 J4.7
N19127612: length 9.3
  TOP w0.127: U1.6 12,23.72 11.66,24.07 11.66,24.29 R3.2 10.87,27.27 10.26,27.88 J1.2
N19127618: length 11.8
  TOP w0.127: J1.3 4.8,25.34 5.44,25.97 7.85,25.97 9.32,24.5 10.69,24.5 10.87,24.32 R5.2 11.53,23.28 11.53,22.8 11.87,22.45 U1.7
N19127922: length 3.1
  TOP w0.127: R6.2 10.9,22.8 11.53,22.16 11.53,21.4 11.75,21.18 U1.8
N19127924: length 2.2
  TOP w0.127: R7.2 11.28,20.51 11.87,19.91 U1.9
N19127989: length 2
  TOP w0.127: U1.12 12.66,15.94 R9.2
N19127991: length 2
  TOP w0.127: U1.13 12.79,14.79 R10.2
N19127993: length 2
  TOP w0.127: U1.14 12.74,13.65 R11.2
N19128918: length 43.1
  TOP w0.127: v1(7.34,13.65) 6.88,13.18 S1.4 S1.2 ; v1(32.74,17.59) 35.28,17.59 35.54,17.84 35.54,21.4 35.03,21.91 R143.2
  BOTTOM w0.127: 31.07,15.91 v1(32.74,17.59) ; 27,15.91 17.48,15.91 17.12,15.56 11.15,15.56 9.88,14.29 8.49,14.29 7.85,13.65 v1(7.34,13.65)
  BOTTOM w0.152: 27,15.91 31.07,15.91
N19129914: length 3.5
  TOP w0.127: R4.1 30.51,17.08 30.08,17.51 30.08,18.22 29.65,18.64 U1.33
N19137656: length 4
  TOP w0.635: L2.2 C47.1 10.75,32.09 10.77,32.07
  TOP w0.813: 10.77,32.07 11.54,31.29 arc(11.81,31.12) 12.12,31.06 U1.2
N19139252: length 10.8
  TOP w0.635: L2.1 C51.1 10.75,36.36 10.77,36.38
  TOP w0.813: ANT1.1 14.3,41.21 14.04,40.96 12.07,40.96 arc(11.15,40.58) 10.77,39.66 10.77,36.38
N19142206: length 2.2
  BOTTOM w0.508: C49.1 19.46,11.24 J8.7
N19142409: length 1.4
  BOTTOM w0.305: LED3.1 19.9,2.88 R20.2
N19145355: length 3.5
  TOP w0.127: U1.34 29.53,19.91 29.69,19.75 29.69,19.11 30.58,18.22 R27.1
N19145484: length 4
  TOP w0.152: U1.28 28.69,12.13 30.84,12.13 30.99,12.28 R31.1
N19147736: length 1.4
  BOTTOM w0.254: R19.2 42.51,3.01 LED2.1
N19157450: length 33.9
  TOP w0.127: v1(30.84,3.36) 30.71,3.36 28.68,1.33 14.71,1.33 13.44,2.6 R140.1 11.94,3.26 TP16.1 ; v1(27.15,10.22) 27.15,13.27 27.45,13.56 U1.29
  BOTTOM w0.127: v1(27.15,10.22) 27.15,7.05 v1(30.84,3.36)
N19158301: length 2.1
  TOP w0.127: R141.2 11.53,17.08 11.83,17.37 U1.11
N19158356: length 2.1
  TOP w0.127: U1.10 11.7,18.64 11.28,18.22 R142.2
N19158507: length 2.5
  TOP w0.152: U1.31 30.82,16.1 R139.1

## Copper pours and planes (outline as drawn; the poured copper is in the pictures)
GND on TOP: 0.74,39.43 0.74,1.71 1.63,0.82 53.7,0.82 54.33,1.46 54.33,37.78 53.57,38.54 38.08,38.54 34.01,34.48 12.55,34.48 12.04,34.99 12.04,39.94 11.91,40.07 1.37,40.07 ; 14 cut-outs
GND on BOTTOM: 2.01,0.82 53.57,0.82 54.33,1.59 54.33,37.78 53.57,38.54 38.08,38.54 34.01,34.48 12.55,34.48 12.04,34.99 12.04,39.94 11.91,40.07 1.37,40.07 0.74,39.43 0.74,2.09 ; 3 cut-outs
SYS_3V3 on TOP: 30.38,7.56 30.56,7.73 31.35,7.73 31.68,8.06 31.95,8.06 32.08,7.94 32.08,4.74 31.6,4.25 30.46,4.25 28.55,2.35 22.2,2.35 22.07,2.48 22.07,2.73 22.96,3.62 28.04,3.62 28.93,4.51 28.93,5.14 29.06,5.27 29.69,5.27 30.38,5.96
N19109066 on TOP: 36.43,7.81 38.08,7.81 38.33,7.56 38.33,6.92 37.82,6.41 32.87,6.41 32.36,6.92 32.36,7.94 32.62,7.94 32.62,7.05 32.74,6.92 35.54,6.92
N19109499 on TOP: 37.95,12 35.03,12 34.9,11.87 34.9,8.7 35.03,8.57 38.97,8.57 44.02,13.63 44.02,16.6 43.66,16.95 38.97,16.95 38.46,16.45 38.46,12.51
N19110009 on TOP: 32.87,7.94 32.87,7.43 33,7.3 35.54,7.3 35.66,7.43 35.66,7.94 35.54,8.06 33,8.06
N19122018 on TOP: 42.14,10.48 43.41,10.48 43.79,10.1 43.79,7.17 42.9,6.29 39.22,6.29 38.97,6.54 38.97,7.3
N19127779 on TOP: 29.69,5.78 29.82,5.9 29.82,6.54 29.69,6.67 27.28,6.67 26.77,7.17 26.77,8.95 26.65,9.08 26.14,9.08 26.01,8.95 26.01,5.9 26.14,5.78

## Text on the board
BOTTOM: ARTWORK BOTTOM
Board Geometry/Soldermask Bottom: SOLDERMASK BOTTOM
Package Geometry/Pastemask Bottom: PASTEMASK BOTTOM
Ref Des/Silkscreen Bottom: D | PWM | AN | INT | RST | RX | CS | SCK | TX | SCL | MISO | SDA | MOSI | +5V | +3.3V | GND | 1 | 2
TOP: ARTWORK TOP
Package Geometry/Pastemask Top: PASTEMASK TOP
Ref Des/Silkscreen Top: A | B | J-Link-6PIN-JTAG | CC1310 Module | BeagleDust Rev A0 | c | +3V | GND | CR2032 Battery
DIMENSION: 2.75mm *4
PAGE_OUTLINE: LAYERS STACKUP | PREPREG | BOTTOM | TOP | LAYER | MATERIAL | COPPER | FR4 | THICKNESS | 1 OZ | LAYER TYPE | ROUTING | PLANE | SINGLE 50ohm+/-10% | Line width(mil) | mil | DIFFERENCE 90ohm-/+10% | Line width/Space(mil) | IMPEDANCE | DIFFERENCE 100ohm-/+10% | 1. ACCEPTABILITY: | 2. MATERIAL: | 3. FABRICATION REQUIREMENTS: | 4. FABRICATION TOLERANCE: | 5. SOLDER MASK: | 6. FINISH: | 7. SILKSCREEN: | 8. BOW AND TWIST: | 9. MEASUREMENTS: | 10.ENVIRONMENTAL: | V0.1 | REV | PRINTED WIRING BOARD SHALL MEET THE REQUIREMENTS OF IPC- 6012C CLASS 2. | GLASS EPOXY FR-4 FIRE RETARDANT AND UL 94V-0 RATING MATERIAL SHOULD MEET | IPC-4101C | A). FAB TO MEET THE REQUIREMENTS PER IPC-A-600, CLASS 2 | B). ALL ARTWORK OR ELECTRONIC DATA MAY BE ADJUSTED BY THE BOARD | C). FABRICATE ACCORDING TO THE FILES PART NO: | D). SOLDER MASK COLOR  GREEN,SILKSCREEN COLOR  WHITE | E). FINISH OSP | A). WIRE WIDTH TOLERANCE INTERNAL CONTROL STANDARD +/-20% | B). PTH  DIAMETER TOLERANCE +/-0.076mm,NPTH DIAMETER TOLERANCE +/-0.05mm | C). ALL OUTER LAYER PADS REQUIRE +/-0.05mm TOLERANCE. | D). LAYER REGISTRATION BETWEEN ADJACENT LAYER MAXIMUN 150um, THE INTERLAYER | E). THICKNESS IS LESS THAN 1mm PCB TO A TOLERANCE OF +/-0.1mm,THICKNESS IS | A). MATERIALS IN ACCORDANCE WITH IPC-SM-840E CLASS T STANDARDS AND ROHS | B). SOLDER MASK BOTH PRIMARY AND SECONDARY SIDES, THE ADHESION OF SOLDER | C). SOLDER MASK COVERAGE ON THE MIDDLE OF THE COPPER WIRE MINIMUM 10um,EDGE | D). ALL HOLES WITH SOLDER MASK COVERED IN THE GERBER SHOULD BE PULGED | E). SOLDER MASK BRIDGE BETWEEN PADS SHOULD BE MINIMUM 0.10mm | A). ENIG, GOLD THICKNESS IS 0.05 um ~0.23um,NICKEL THICKNESS IS 3 um ~6 um. | B). OSP, THE OSP COATING THICKNESS IS 0.2 um ~0.5um. | C). LF HASL, Sn THICKNESS IS 1 um ~40um . | A). PRIMARY AND SECONDARY SIDES USING A GLOSSY , NON-CONDUCTIVE, RoHS COMPLIANT, | B). NO SILKSCREEN ALLOWED ON PADS OR IN HOLES | C). MANUFACTUREERS CAN ADD SYMBOL IN SILKSCREEN LAYER OR SOLDER MASK LAYER, | MAX BOW & TWIST OF PCB SHALL NOT EXCEED 0.75% OF MAXIMUN DIMENSION, | MEASUREMENT METHOD IN 2.4.22 OF IPC-TM-650 IS FOR REFERENCE | INTERPRET ALL DIMENSIONS AND TOLERANCES PER IPC-D-300G, CLASS B AND ALL | DIMENSIONS ARE METRIC, DIMENSIONS ARE AFTER ETCHING AND PLATING. | THE  PCB SUPPLIER SHALL PROVIDE A SIGNED CERTIFICATE OF COMPLIANCE BY | AUTHORIZED QA  REPRESENTATIVE. THE BASE MATERIAL OF PCB SHALL NOT CONTAIN THE | BANNED SUBSTANCES LISTED IN THE CERTIFICATE OF COMPLIANCE. | MANUFACTURER TO COMPENSATE FOR MANUFACTURING PROCESS TOLERANCES, | ADDITION OF FILLETS TEARDROPS AT LINE / PAD INTERFACE IS PREFERRED. | THIEVING IS ALLOWED TO COMPENSATE FOR HIGH COPPER DENSITY AREAS | 4000171 BeagleDust Rev A0 FOR MANUFACTURE | DIELECTRIC THICKNESS TOLERANCE +/-15% | GREATER THAN OR EQUAL TO 1mm PCB TO A TOLERANCE OF +/-10% | REQUIREMENTS | MASK MEET THE REQUIREMENTS OF IPC-A-600F LEVEL 2 | COVERAGE OF THE COPPER WIRE MINIMUM 4um, SOLDER MASK MISREGISTRATION | MAXIM 2.5mil | EPOXY BASED INK | ALLOW TO INCREASE SYMBOL :ASSEMBLY REF , DATE CODE, LEAD-FREE SYMBOL, UL FILE | NUMBER,UL TYPE, UL SYMBOL AND FIRE RATING,NO LIST DOES NOT ALLOW TO INCREASE. | ACTION | TITLE: | PART NUMBER: | ADD: | www.embest-tech.com | Digital Dust V0.1 | 4000171 | 2018/05/15 | ELEC ENGR: | REV: | DATE: | DATE | A0 | 20180906 | JACK WANG 17503088048 | JACK WANG | AUTH | D | C | B | A | 1 | THE TOTAL THICKNESS: 1.2mm +/-10% | LAYERS LAMINATION & IMPENDANCE  CONTROL | 2 | 3 | 4 | 5 | 6 | NOTE | Embest Technology co.,Ltd. | 7 | REVISIONS | 8
User.16: FIGURE | SIZE | 10.0 | 39.37 | 94.49 | 108.27 | DRILL CHART: TOP to BOTTOM | ALL UNITS ARE IN MILS | PLATED | NON-PLATED | QTY | 569 | 3 | 4
